# Altium PCB Modulo_THREAD.pcbdoc
Units mm, origin at the board's own origin, x right, y up, seen from the top; angles counter-clockwise.
Board outline 60.34 x 40.36 mm, 2 copper layers (Top Layer, Bottom Layer); 23 components, 124 nets, 327 pads, 146 vias.
Unrouted connection lines stored in the file: 1.
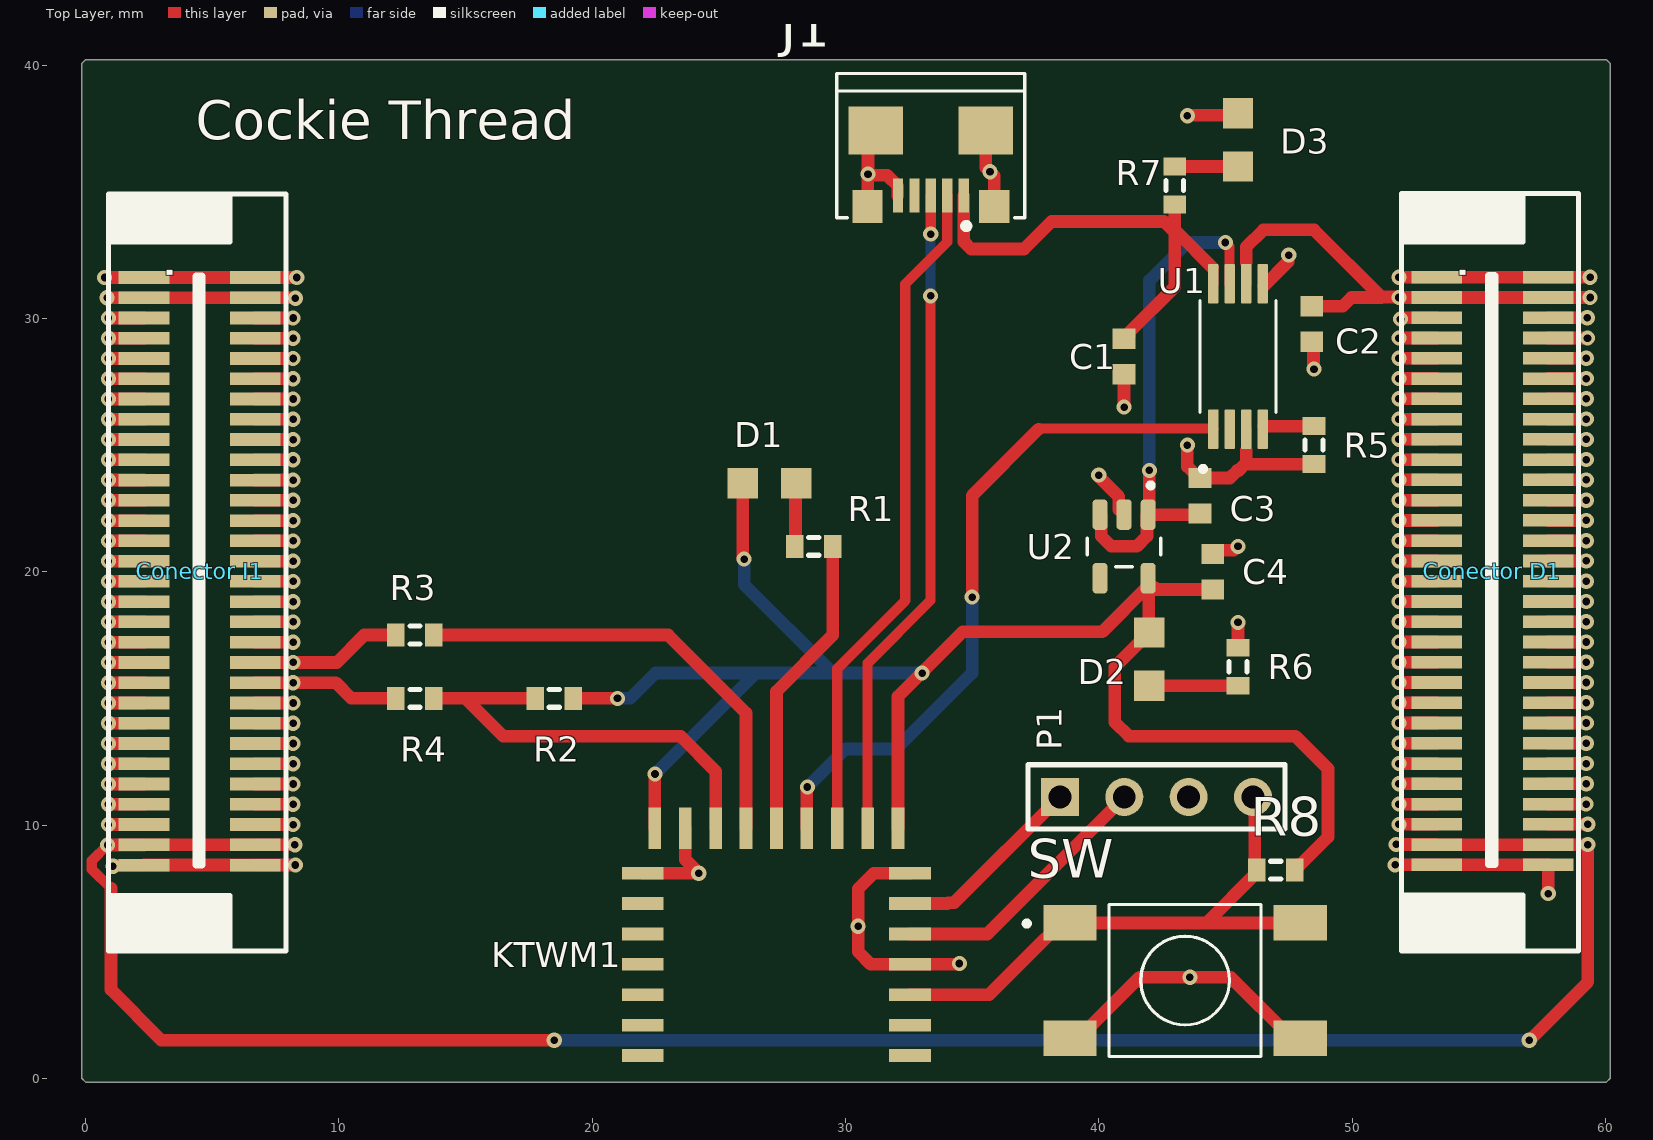
[diagram p0: Top Layer view]
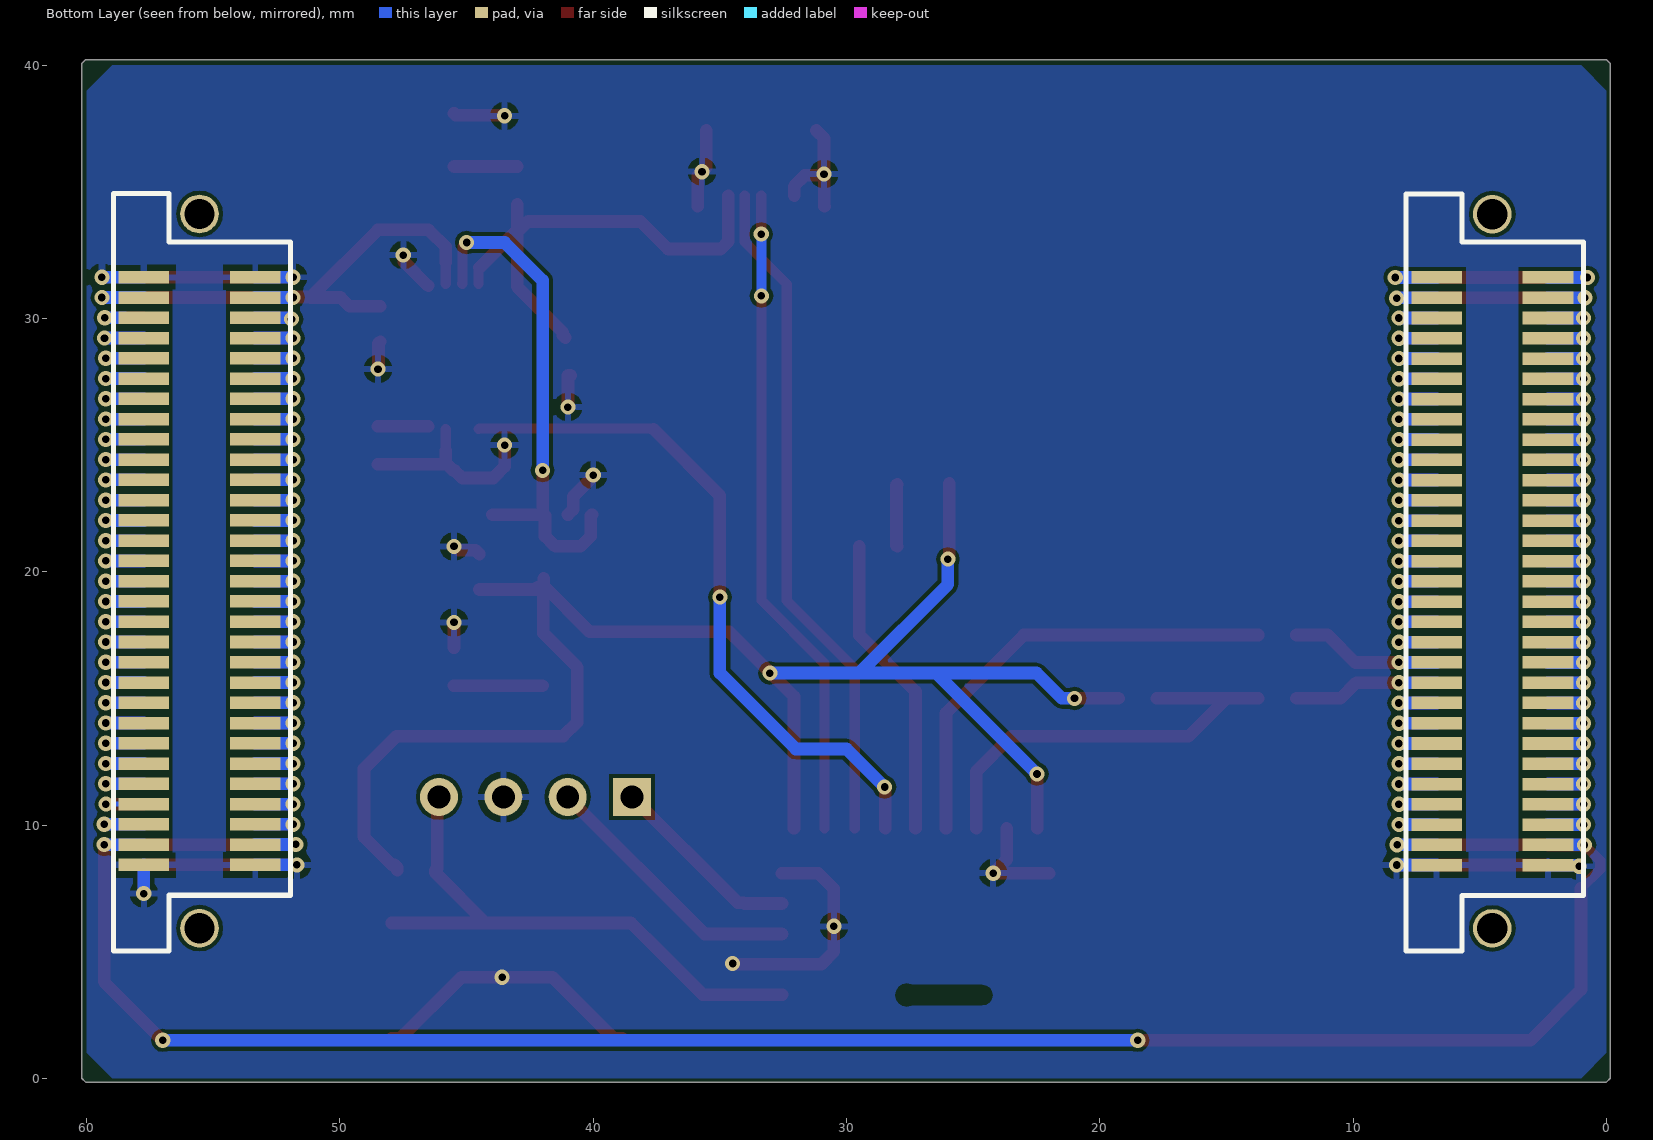
[diagram p1: Bottom Layer view, seen from below]

## Layer stack, top to bottom
Top Solder: solder mask 0.01, Solder Resist, Dk 3.5
Top Layer: signal copper 0.035
Dielectric1: dielectric 0.32, FR-4, Dk 4.8
Bottom Layer: signal copper 0.035
Bottom Solder: solder mask 0.01, Solder Resist, Dk 3.5

## Board outline
-0.15,0 0,-0.15 60.044,-0.15 60.194,0 60.194,40.063 60.044,40.213 0,40.213 -0.15,40.063

## Design rules (kind name [scope] priority, off if disabled: settings)
Clearance Clearance_2 [OnLayer('Bottom Layer') And (IsThruPin Or IsSMTPin Or IsWire) vs OnLayer('Bottom Layer') And (IsThruPin Or IsSMTPin Or IsWire Or IsVia)] p1: gap=0.2 ignorepadtopadclearanceinfootprint=FALSE except(0: Arc-Hole Track-Hole SMDPad-Hole THPad-Hole Via-Hole Fill-Hole Poly-Hole Region-Hole Text-Hole)
Clearance Clearance_1 [OnLayer('Top Layer') And (IsThruPin Or IsSMTPin Or IsWire Or IsVia) vs OnLayer('Top Layer') And (IsThruPin Or IsSMTPin Or IsWire Or IsVia)] p2: gap=0.2 ignorepadtopadclearanceinfootprint=FALSE except(0: Arc-Hole Track-Hole SMDPad-Hole THPad-Hole Via-Hole Fill-Hole Poly-Hole Region-Hole Text-Hole)
Clearance [All] p3: gap=0.15 ignorepadtopadclearanceinfootprint=FALSE except(0: Arc-Hole Track-Hole SMDPad-Hole THPad-Hole Via-Hole Fill-Hole Poly-Hole Region-Hole Text-Hole)
PlaneConnect [All] p1: planeconnectstyle=Relief reliefexpansion=0.635 reliefentries=4 reliefconductorwidth=0.305 reliefairgap=0.254
PolygonConnect [All] p1: connectstyle=Relief reliefconductorwidth=0.254 reliefentries=4 polygonreliefangle="90 Angle" airgapwidth=0.254
RoutingVias [All] p1: holewidth=0.711 width=1.27 viastyle="Through Hole" minholewidth=0.711 minwidth=1.27 maxholewidth=0.711 maxwidth=1.27
SolderMaskExpansion [All] p1: expansion=0 istentingtop=FALSE
Width Width_1 [All] p1: maxlimit=0.5 minlimit=0.3 preferedwidth=0.3 minimp=50.000000 maximp=50.000000 favimp=50.000000
Width Net_Width_8 [InNet('N76831')] p2: maxlimit=0.005 minlimit=0.005 preferedwidth=0.005
Width Net_Width_7 [InNet('I51') Or InNet('I52') Or InNet('I53') Or InNet('I54') Or InNet('I55') Or InNet('I56') Or InNet('I57') Or InNet('I58')] p3: maxlimit=0.2 minlimit=0.2 preferedwidth=0.2
Width Net_Width_6 [InNet('I35') Or InNet('I36') Or InNet('I37') Or InNet('I38') Or InNet('I39') Or InNet('I40') Or InNet('I41') Or InNet('I42') Or InNet('I43') Or InNet('I44') Or InNet('I45') Or InNet('I46') Or InNet('I47') Or InNet('I48') Or InNet('I49') Or InNet('I50')] p4: maxlimit=0.2 minlimit=0.2 preferedwidth=0.2
Width Net_Width_5 [InNet('I15') Or InNet('I16') Or InNet('I17') Or InNet('I18') Or InNet('I19') Or InNet('I20') Or InNet('I21') Or InNet('I22') Or InNet('I23') Or InNet('I24') Or InNet('I25') Or InNet('I26') Or InNet('I27') Or InNet('I28') Or InNet('I33') Or InNet('I34')] p5: maxlimit=0.2 minlimit=0.2 preferedwidth=0.2
Width Net_Width_4 [InNet('D55') Or InNet('D56') Or InNet('DGND') Or InNet('DVDD') Or InNet('I3') Or InNet('I4') Or InNet('I5') Or InNet('I6') Or InNet('I7') Or InNet('I8') Or InNet('I9') Or InNet('I10') Or InNet('I11') Or InNet('I12') Or InNet('I13') Or InNet('I14')] p6: maxlimit=0.2 minlimit=0.2 preferedwidth=0.2
Width Net_Width_3 [InNet('D39') Or InNet('D40') Or InNet('D41') Or InNet('D42') Or InNet('D43') Or InNet('D44') Or InNet('D45') Or InNet('D46') Or InNet('D47') Or InNet('D48') Or InNet('D49') Or InNet('D50') Or InNet('D51') Or InNet('D52') Or InNet('D53') Or InNet('D54')] p7: maxlimit=0.2 minlimit=0.2 preferedwidth=0.2
Width Net_Width_2 [InNet('D17') Or InNet('D18') Or InNet('D19') Or InNet('D20') Or InNet('D21') Or InNet('D22') Or InNet('D23') Or InNet('D24') Or InNet('D25') Or InNet('D26') Or InNet('D27') Or InNet('D28') Or InNet('D35') Or InNet('D36') Or InNet('D37') Or InNet('D38')] p8: maxlimit=0.2 minlimit=0.2 preferedwidth=0.2
Width Net_Width_1 [InNet('AGND') Or InNet('AVDD') Or InNet('D3') Or InNet('D4') Or InNet('D5') Or InNet('D6') Or InNet('D7') Or InNet('D8') Or InNet('D9') Or InNet('D10') Or InNet('D11') Or InNet('D12') Or InNet('D13') Or InNet('D14') Or InNet('D15') Or InNet('D16')] p9: maxlimit=0.2 minlimit=0.2 preferedwidth=0.2
Width [All] p10: maxlimit=0.203 minlimit=0.203 preferedwidth=0.203
29 further rules are at their usual default settings.

## Classes and differential pairs
component class Alimentacion: C1 C2 C3 C4 D2 R5 R6 U1 U2
component class USB: D3 J1 R7
component class Modulo: 1 D1 P1 R1 R2 R3 R4 R8 SW
component class Conectores: "Conector D1" "Conector I1"

## Components (designator, comment, footprint, x,y, rotation, side; value= is the part's Value field where it differs from the comment)
C1 "GRM188R60J106ME84D" 1608[0603] 41,28.5 r270 top value=10u
C2 "GRM188R60J106ME84D" 1608[0603] 48.41,29.78 r90 top value=10u
C3 "0603B104K6R3CT" 1608[0603] 44,23 r90 top value=0.1uF
C4 "0603B104K6R3CT" 1608[0603] 44.5,20 r270 top value=0.1uF
"Conector D1" "Cookie_Connector" COOKIECON_HEADER_AND_SOCKET 53.347,31.626 r270 top
"Conector I1" "Cookie_Connector" COOKIECON_HEADER_AND_SOCKET 2.305,31.619 r270 top
D1 "LTST-C170TBKT" DIOC200X125X110 27,23.5 r180 top
D2 "LTST-C170TBKT" DIOC200X125X110 42,16.55 r90 top
D3 "LTST-C170TBKT" DIOC200X125X110 45.5,37.05 r90 top
J1 "DX4R005HJ5R2000" JAE_DX4R005HJ5R2000 33.37,34.85 r180 top
KTWM1 "KTWM102" KTWM102 32.55,0.9 r0 top
P1 "Header 4" HDR1X4 38.47,11.11 r0 top
R1 "ERJ-1GNF66R5C" J1-0603 28.75,21 r0 top value=66.5
R2 "RCS060340K2FKEA" J1-0603 18.5,15 r180 top value=40.2K
R3 "ERJ-UP3D1001V" J1-0603 13,17.5 r0 top value=1K
R4 "ERJ-UP3D1001V" J1-0603 13,15 r0 top value=1K
R5 "ERJ-3RBD2491V" J1-0603 48.5,25 r90 top value=2.49k
R6 "ERJ-1GNF66R5C" J1-0603 45.5,16.25 r90 top value=66.5
R7 "ERJ-UP3D1001V" J1-0603 43,35.25 r270 top value=1K
R8 "ERJ-UP3D1001V" J1-0603 46.99,8.22 r0 top value=1K
SW "4-1437565-2" SW_4-1437565-2 43.41,3.86 r0 top
U1 "TPS2115APWR" SOP65P640X120-8N 45.5,28.5 r90 top
U2 "LP5907QMFX-3.3Q1" SOT95P280X145-5N 41,21 r270 top

## Footprints (in the part's own frame and the unit in brackets; to place one, negate y for a bottom-side part, rotate by r counter-clockwise, add the part's x,y. Pads: shape width x height; smd on the part's side, far side on the other; paste and mask are expansions set on the pad)
1608[0603] [mm] "Chip Capacitor, Body 1.6x0.8mm, IPC High Density"
  rect 0.8x0.9 smd: 1(-0.7,0) 2(0.7,0)
  body extent -0.87,-0.48 0.87,0.48, height 1.3
COOKIECON_HEADER_AND_SOCKET [mil]
  rect 19.63x78.73 smd: 1(0,0) 2(31.48,0) 3(63,0) 4(94.48,0) 5(126,0) 6(157.47,0) 7(188.97,0) 8(220.47,0) 9(251.97,0) 10(283.45,0) 11(314.95,0) 12(346.45,0) 13(377.95,0) 14(409.43,0) 15(440.93,0) 16(472.43,0) 17(503.93,0) 18(535.42,0) 19(566.92,0) 20(598.42,0) 21(629.92,0) 22(661.42,0) 23(692.9,0) 24(724.4,0) 25(755.9,0) 26(787.4,0) 27(818.88,0) 28(850.38,0) 29(881.88,0) 30(913.38,0) 31(913.38,173.22) 32(881.88,173.22) 33(850.38,173.22) 34(818.88,173.22) 35(787.4,173.22) 36(755.9,173.22) 37(724.4,173.22) 38(692.9,173.22) 39(661.42,173.22) 40(629.92,173.22) 41(598.42,173.22) 42(566.92,173.22) 43(535.42,173.22) 44(503.93,173.22) 45(472.43,173.22) 46(440.93,173.22) 47(409.43,173.22) 48(377.95,173.22) 49(346.45,173.22) 50(314.95,173.22) 51(283.45,173.22) 52(251.97,173.22) 53(220.47,173.22) 54(188.97,173.22) 55(157.47,173.22) 56(126,173.22) 57(94.48,173.22) 58(63,173.22) 59(31.48,173.22) 60(0,173.22)
  rect 19.47x78.73 smd far side: 61(0,173.22) 62(31.48,173.22) 63(63,173.22) 64(94.48,173.22) 65(126,173.22) 66(157.47,173.22) 67(188.97,173.22) 68(220.47,173.22) 69(251.97,173.22) 70(283.45,173.22) 71(314.95,173.22) 72(346.45,173.22) 73(377.95,173.22) 74(409.43,173.22) 75(440.93,173.22) 76(472.43,173.22) 77(503.93,173.22) 78(535.42,173.22) 79(566.92,173.22) 80(598.42,173.22) 81(629.92,173.22) 82(661.42,173.22) 83(692.9,173.22) 84(724.4,173.22) 85(755.9,173.22) 86(787.4,173.22) 87(818.88,173.22) 88(850.38,173.22) 89(881.88,173.22) 90(913.38,173.22) 91(913.38,0) 92(881.88,0) 93(850.38,0) 94(818.88,0) 95(787.4,0) 96(755.9,0) 97(724.4,0) 98(692.9,0) 99(661.42,0) 100(629.92,0) 101(598.42,0) 102(566.92,0) 103(535.42,0) 104(503.93,0) 105(472.43,0) 106(440.93,0) 107(409.43,0) 108(377.95,0) 109(346.45,0) 110(314.95,0) 111(283.45,0) 112(251.97,0) 113(220.47,0) 114(188.97,0) 115(157.47,0) 116(126,0) 117(94.48,0) 118(63,0) 119(31.48,0) 120(0,0)
  round 47.23 / inner round 60 / far side round 60 hole 47.23: 121(1011.8,86.6) 122(-98.42,86.6)
  silkscreen extent -130,-55 1047,220
DIOC200X125X110 [mm]
  rect 1.2x1.2 smd: NEG(-1.05,0) POS(1.05,0)
HDR1X4 [mm] "Connector; Header; 4 Position"
  rect 1.5x1.5 hole 0.9: 1(0,0)
  round 1.5 hole 0.9: 2(2.54,0) 3(5.08,0) 4(7.62,0)
  silkscreen extent -1.27,-1.27 8.89,1.27
J1-0603 [mm] "Chip Resistor, Body 1.6x0.8mm, IPC High Density"
  rect 0.7x0.9 smd: 1(-0.75,0) 2(0.75,0)
  silkscreen extent -0.2,-0.35 0.2,0.35, body extent -0.85,-0.48 0.85,0.48, height 0.9
JAE_DX4R005HJ5R2000 [mm]
  rect 0.4x1.35 smd: 1(-1.3,0) 2(-0.65,0) 3(0,0) 4(0.65,0) 5(1.3,0)
  rect 1.2x1.3 smd: SH1(-2.5,0.425) SH2(2.5,0.425)
  rect 2.15x1.9 smd: SH3(-2.175,-2.575) SH4(2.175,-2.575)
  silkscreen extent -3.71,-4.82 3.71,1.32
KTWM102 [mm]
  rect 1.65x0.5 smd: 1(0,0) 2(0,1.2) 3(0,2.4) 4(0,3.6) 5(0,4.8) 6(0,6) 7(0,7.2) 17(-10.55,7.2) 18(-10.55,6) 19(-10.55,4.8) 20(-10.55,3.6) 21(-10.55,2.4) 22(-10.55,1.2) 23(-10.55,0)
  rect 0.5x1.65 smd: 8(-0.475,8.975) 9(-1.675,8.975) 10(-2.875,8.975) 11(-4.075,8.975) 12(-5.275,8.975) 13(-6.475,8.975) 14(-7.675,8.975) 15(-8.875,8.975) 16(-10.075,8.975)
  body extent -10.79,-5.98 0.31,9.43, height 2
SOP65P640X120-8N [mm]
  rrect25% 1.57x0.41 smd: 1(-2.87,0.975) 2(-2.87,0.325) 3(-2.87,-0.325) 4(-2.87,-0.975) 5(2.87,-0.975) 6(2.87,-0.325) 7(2.87,0.325) 8(2.87,0.975)
  silkscreen extent -4.54,-1.5 2.2,1.5, body extent -3.07,-1.48 3.33,1.52, height 1.2
SOT95P280X145-5N [mm]
  rrect50% 1.21x0.59 smd: 1(-1.255,0.95) 2(-1.255,0) 3(-1.255,-0.95) 4(1.255,-0.95) 5(1.255,0.95)
  silkscreen extent -2.51,-1.45 0.8,1.45, body extent -1.4,-1.45 1.4,1.45, height 1.45
SW_4-1437565-2 [mm]
  rect 2.1x1.4 smd: 1(-4.55,2.275) 2(4.55,2.275) 3(-4.55,-2.275) 4(4.55,-2.275)
  silkscreen extent -6.35,-3 3,3, body extent -5.3,-2.87 4.7,3.13, height 4.98

## Part data
C1 C2: library part "Cap Semi", "Capacitor (Semiconductor SIM Model)", Supplier Part Number 1=81-GRM188R60J106ME4D, LatestRevisionDate=29-May-2009, LatestRevisionNote="IPC-7351 Footprint Added.", PackageDescription="Chip Capacitor", PackageReference=C1206, Published=8-Jun-2000, Publisher="Altium Limited", Supplier 1=Mouser, Supplier 2=Digi-Key, Supplier Part Number 2=490-7316-6-ND
C3 C4: library part "Cap Semi", "Capacitor (Semiconductor SIM Model)", Supplier Part Number 1=791-0603B104K6R3CT, LatestRevisionDate=29-May-2009, LatestRevisionNote="IPC-7351 Footprint Added.", PackageDescription="Chip Capacitor", PackageReference=C1206, Published=8-Jun-2000, Publisher="Altium Limited", Supplier 1=Mouser
D1 D2: "Blue 470nm LED Indication - Discrete 3.3V 0805 _2012 Metric_", Package="0805 Lite-On", Supplier Part Number 1=160-1579-6-ND, Digi-Key_Part_Number=160-1579-1-ND, Digi-Key_Purchase_URL=https://www.digikey.jp/product-detail/en/lite-on-inc/LTST-C170TBKT/160-1579-1-ND/564889?utm_source=snapeda&utm_medium=aggregator&utm_campaign=symbol, MF="Lite-On Inc.", MP=LTST-C170TBKT, SnapEDA_Link=https://www.snapeda.com/parts/LTST-C170TBKT/Lite-On%20Inc./view-part/217848/?ref=snap, Supplier 1=Digi-Key, Supplier 2=RSComponents, Supplier 3=Mouser, Supplier Part Number 2=6920913, Supplier Part Number 3=859-LTST-C170TBKT
D3: "Blue 470nm LED Indication - Discrete 3.3V 0805 _2012 Metric_", Package="0805 Lite-On", Supplier Part Number 1=160-1579-1-ND, Digi-Key_Part_Number=160-1579-1-ND, Digi-Key_Purchase_URL=https://www.digikey.jp/product-detail/en/lite-on-inc/LTST-C170TBKT/160-1579-1-ND/564889?utm_source=snapeda&utm_medium=aggregator&utm_campaign=symbol, MF="Lite-On Inc.", MP=LTST-C170TBKT, SnapEDA_Link=https://www.snapeda.com/parts/LTST-C170TBKT/Lite-On%20Inc./view-part/217848/?ref=snap, Supplier 1=Digi-Key, Supplier 2=RSComponents, Supplier 3=Mouser, Supplier Part Number 2=6920913, Supplier Part Number 3=859-LTST-C170TBKT
J1: "USB - micro B USB 2.0 Receptacle Connector 5 Position Surface Mount, Right Angle", Package=None, Supplier Part Number 1=656-DX4R005HJ5R2000, Availability=Unavailable, MF="JAE Electronics", MP=DX4R005HJ5R2000, Price=None, SnapEDA_Link=https://www.snapeda.com/parts/DX4R005HJ5R2000/JAE%20Electronics/view-part/554854/?ref=snap, Supplier 1=Mouser, Supplier 2=Digi-Key, Supplier Part Number 2=670-2674-6-ND
KTWM1: "https://www.kirale.com/products/ktwm102/"
P1: "Header, 4-Pin", LatestRevisionDate=17-Jul-2002, LatestRevisionNote="Re-released for DXP Platform.", Publisher="Altium Limited"
R1 R6: library part Res3, "Resistor", Supplier Part Number 1=667-ERJ-1GNF66R5C, LatestRevisionDate=29-May-2009, LatestRevisionNote="IPC-7351 Footprint Added.", PackageDescription="Chip Resistor", PackageReference=J1-0603, Published=8-Jun-2000, Publisher="Altium Limited", Supplier 1=Mouser
R2: library part Res3, "Resistor", Supplier Part Number 1=71-RCS060340K2FKEA, LatestRevisionDate=29-May-2009, LatestRevisionNote="IPC-7351 Footprint Added.", PackageDescription="Chip Resistor", PackageReference=J1-0603, Published=8-Jun-2000, Publisher="Altium Limited", Supplier 1=Mouser, Supplier 2=Digi-Key, Supplier Part Number 2=541-10468-6-ND
R3 R7 R8: library part Res3, "Resistor", Supplier Part Number 1=667-ERJ-UP3D1001V, LatestRevisionDate=29-May-2009, LatestRevisionNote="IPC-7351 Footprint Added.", PackageDescription="Chip Resistor", PackageReference=J1-0603, Published=8-Jun-2000, Publisher="Altium Limited", Supplier 1=Mouser
R4: library part Res3, "Resistor", LatestRevisionDate=29-May-2009, LatestRevisionNote="IPC-7351 Footprint Added.", PackageDescription="Chip Resistor", PackageReference=J1-0603, Published=8-Jun-2000, Publisher="Altium Limited", Supplier 1=Mouser
R5: library part Res3, "Resistor", Supplier Part Number 1=667-ERJ-3RBD2491V, LatestRevisionDate=29-May-2009, LatestRevisionNote="IPC-7351 Footprint Added.", PackageDescription="Chip Resistor", PackageReference=J1-0603, Published=8-Jun-2000, Publisher="Altium Limited", Supplier 1=Mouser
SW: "Switch Tactile OFF _ON_ SPST Round Button Gull Wing 0.05A 24VDC 1VA 9.18N SMD T/R", Package=None, Supplier Part Number 1=7182455, Availability=Unavailable, MF="TE Connectivity", MP=FSM4JSMATR, Price=None, SnapEDA_Link=https://www.snapeda.com/parts/FSM4JSMATR/TE%20Connectivity%20ALCOSWITCH%20Switches/view-part/2774279/?ref=snap, Supplier 1=RSComponents, Supplier 2=Mouser, Supplier Part Number 2=506-FSM4JSMATR, TE_purchase_URL=https://www.te.com/usa-en/product-4-1437565-2.html?te_bu=Cor&te_type=disp&te_campaign=seda_glo_cor-seda-global-disp-prtnr-fy19-seda-model-bom-cta_sma-317_1&elqCampaignId=32493
U1: "2.8-5.5-V, 84-m?, 1.25-A, power mux with manual, automatic switchover and status output 8-TSSOP -40 to 85", Package=None, Supplier Part Number 1=595-TPS2115APWR, Availability=Unavailable, MP=TPS2115APWR, Price=None, Supplier 1=Mouser, Supplier 2=Digi-Key, Supplier Part Number 2=296-16940-6-ND
U2: "Automotive 250-mA, low-noise, high-PSRR, low-IQ, ultra-low-dropout voltage regulator with low-IQ 5-SOT-23 -40 to 125", Package="SOT-23-5 Texas Instruments", Supplier Part Number 1=595-LP5907QMFX-3.3Q1, Availability=Good, Check_prices=https://www.snapeda.com/parts/LP5907QMFX-3.3Q1/Texas%20Instruments/view-part/559786/?ref=eda, MF="Texas Instruments", MP=LP5907QMFX-3.3Q1, Price=None, Purchase-URL=https://pricing.snapeda.com/search/part/LP5907QMFX-3.3Q1/?ref=eda, SnapEDA_Link=https://www.snapeda.com/parts/LP5907QMFX-3.3Q1/Texas%20Instruments/view-part/559786/?ref=snap, Supplier 1=Mouser

## Via types
v1: diameter 0.6, hole 0.3, Top Layer to Bottom Layer, 146 vias

## Nets (pads, with @x,y where several pads share a name; then routed paths per layer and width w, separated by ;. In a path a pad name is that pad's centre, name@x,y a point inside that pad or via, vN(x,y) a via of type N, cw(c..) or ccw(c..) an arc to the next point about the centre after c; other vN are vias at no path point)
3V3: C4.2 D1.POS D2.POS KTWM1.8 KTWM1.16 R2.1 R8.2 U2.5 | length 70.4
  Top Layer w0.5: R2.1 v1(21,15) ; KTWM1.16 v1@22.475,11.975 ; D1.POS 25.95,20.55 v1(26,20.5) ; KTWM1.8 32.075,15.075 33,16 v1(33.025,16) ; v1@33.1,16.1 34.625,17.625 40.14,17.625 41.95,19.435 U2.5@41.95,19.545 ; U2.5 U2.5@41.95,19.545 ; C4.2 42.288,19.3 42.198,19.39 41.995,19.39 U2.5@41.975,19.41 ; R8.2 47.74,8.32 47.84,8.42 47.94,8.42 49.05,9.53 49.05,12.22 47.76,13.51 41.19,13.51 40.63,14.07 40.63,16.23 41.975,17.575 U2.5@41.975,19.41 ; U2.5@41.95,19.545 41.975,19.52 U2.5@41.975,19.41
  Bottom Layer w0.5: v1(21,15) 21.5,15 22.5,16 26.466,16 ; v1(22.481,12.015) 26.466,16 ; v1(26,20.5) 26,19.5 29.5,16 ; v1(33.025,16) 29.5,16 ; 26.466,16 29.5,16
AGND: "Conector I1.1" "Conector I1.60" "Conector I1.61" "Conector I1.120" | length 10.8
  Top Layer w0.5: v1(0.751,31.619) 2.305,31.619 6.705,31.619 v1(8.341,31.619)
  Bottom Layer w0.5: v1(0.751,31.619) 2.305,31.619 ; 6.705,31.619 v1(8.341,31.619)
AVDD: "Conector I1.2" "Conector I1.59" "Conector I1.62" "Conector I1.119" | length 12.1
  Top Layer w0.5: v1(0.847,30.819) 2.305,30.819 6.705,30.819 8.265,30.818 v1(8.284,30.8)
  Bottom Layer w0.2: 6.705,30.819 v1@8.284,30.819
  Bottom Layer w0.5: v1(0.847,30.819) 2.305,30.819 ; 6.705,30.819 6.708,30.816 8.268,30.816 v1(8.284,30.8)
D3: "Conector D1.3" "Conector D1.118" | length 2.9
  Top Layer w0.5: v1(51.914,29.974) 51.941,29.974 51.992,30.026 53.346,30.026
  Bottom Layer w0.2: v1(51.914,29.974) v1@51.94,30
  Bottom Layer w0.5: v1@51.94,30 51.947,29.993 51.96,29.993 51.99,30.023 53.344,30.023 53.347,30.026
D4: "Conector D1.4" "Conector D1.117" | length 3
  Top Layer w0.5: v1(51.852,29.227) 53.347,29.227
  Bottom Layer w0.5: v1(51.852,29.227) 53.347,29.227
D5: "Conector D1.5" "Conector D1.116" | length 3
  Top Layer w0.5: v1(51.852,28.426) 53.347,28.426
  Bottom Layer w0.5: v1(51.852,28.426) 53.347,28.426
D6: "Conector D1.6" "Conector D1.115" | length 3
  Top Layer w0.5: v1(51.852,27.627) 53.347,27.627
  Bottom Layer w0.5: v1(51.852,27.627) 53.347,27.627
D7: "Conector D1.7" "Conector D1.114" | length 3
  Top Layer w0.5: v1(51.852,26.827) 53.347,26.827
  Bottom Layer w0.5: v1(51.852,26.827) 53.347,26.827
D8: "Conector D1.8" "Conector D1.113" | length 3
  Top Layer w0.5: v1(51.852,26.027) 53.347,26.027
  Bottom Layer w0.5: v1(51.852,26.027) 53.347,26.027
D9: "Conector D1.9" "Conector D1.112" | length 3
  Top Layer w0.5: v1(51.852,25.226) 53.347,25.226
  Bottom Layer w0.5: v1(51.852,25.226) 53.347,25.226
D10: "Conector D1.10" "Conector D1.111" | length 3
  Top Layer w0.5: v1(51.852,24.427) 53.347,24.427
  Bottom Layer w0.5: v1(51.852,24.427) 53.347,24.427
D11: "Conector D1.11" "Conector D1.110" | length 3
  Top Layer w0.5: v1(51.852,23.627) 53.347,23.627
  Bottom Layer w0.5: v1(51.852,23.627) 53.347,23.627
D12: "Conector D1.12" "Conector D1.109" | length 3
  Top Layer w0.5: v1(51.852,22.827) 53.347,22.827
  Bottom Layer w0.5: v1(51.852,22.827) 53.347,22.827
D13: "Conector D1.13" "Conector D1.108" | length 3
  Top Layer w0.5: v1(51.852,22.026) 53.347,22.026
  Bottom Layer w0.5: v1(51.852,22.026) 53.347,22.026
D14: "Conector D1.14" "Conector D1.107" | length 3
  Top Layer w0.5: v1(51.852,21.227) 53.347,21.227
  Bottom Layer w0.5: v1(51.852,21.227) 53.347,21.227
D15: "Conector D1.15" "Conector D1.106" | length 3
  Top Layer w0.5: v1(51.852,20.427) 53.347,20.427
  Bottom Layer w0.5: v1(51.852,20.427) 53.347,20.427
D16: "Conector D1.16" "Conector D1.105" | length 3
  Top Layer w0.5: v1(51.852,19.627) 53.347,19.627
  Bottom Layer w0.5: v1(51.852,19.627) 53.347,19.627
D17: "Conector D1.17" "Conector D1.104" | length 3
  Top Layer w0.5: v1(51.852,18.826) 53.347,18.826
  Bottom Layer w0.5: v1(51.852,18.826) 53.347,18.826
D18: "Conector D1.18" "Conector D1.103" | length 3
  Top Layer w0.5: v1(51.852,18.027) 53.347,18.027
  Bottom Layer w0.5: v1(51.852,18.027) 53.347,18.027
D19: "Conector D1.19" "Conector D1.102" | length 3
  Top Layer w0.5: v1(51.852,17.227) 53.347,17.227
  Bottom Layer w0.5: v1(51.852,17.227) 53.347,17.227
D20: "Conector D1.20" "Conector D1.101" | length 3
  Top Layer w0.5: v1(51.852,16.427) 53.347,16.427
  Bottom Layer w0.5: v1(51.852,16.427) 53.347,16.427
D21: "Conector D1.21" "Conector D1.100" | length 3
  Top Layer w0.5: v1(51.852,15.627) 53.347,15.627
  Bottom Layer w0.5: v1(51.852,15.627) 53.347,15.627
D22: "Conector D1.22" "Conector D1.99" | length 3
  Top Layer w0.5: v1(51.852,14.826) 53.347,14.826
  Bottom Layer w0.5: v1(51.852,14.826) 53.347,14.826
D23: "Conector D1.23" "Conector D1.98" | length 3
  Top Layer w0.5: v1(51.852,14.027) 53.347,14.027
  Bottom Layer w0.5: v1(51.852,14.027) 53.347,14.027
D24: "Conector D1.24" "Conector D1.97" | length 3
  Top Layer w0.5: v1(51.852,13.227) 53.347,13.227
  Bottom Layer w0.5: v1(51.852,13.227) 53.347,13.227
D25: "Conector D1.25" "Conector D1.96" | length 3
  Top Layer w0.5: v1(51.852,12.427) 53.347,12.427
  Bottom Layer w0.5: v1(51.852,12.427) 53.347,12.427
D26: "Conector D1.26" "Conector D1.95" | length 3
  Top Layer w0.5: v1(51.852,11.626) 53.347,11.626
  Bottom Layer w0.5: v1(51.852,11.626) 53.347,11.626
D27: "Conector D1.27" "Conector D1.94" | length 3
  Top Layer w0.5: v1(51.852,10.827) 53.347,10.827
  Bottom Layer w0.5: v1(51.852,10.827) 53.347,10.827
D28: "Conector D1.28" "Conector D1.93" | length 3
  Top Layer w0.5: v1(51.852,10.027) 53.347,10.027
  Bottom Layer w0.5: v1(51.852,10.027) 53.347,10.027
D33: "Conector D1.33" "Conector D1.88" | length 3.1
  Top Layer w0.203: v1@59.303,10.029 v1(59.305,10.031)
  Top Layer w0.5: 57.747,10.027 59.301,10.027 v1@59.303,10.029
  Bottom Layer w0.203: v1@59.303,10.029 v1(59.305,10.031)
  Bottom Layer w0.5: 57.746,10.027 57.749,10.029 v1@59.303,10.029
D34: "Conector D1.34" "Conector D1.87" | length 3.1
  Top Layer w0.5: 57.747,10.827 v1(59.243,10.827)
  Bottom Layer w0.2: v1@59.243,10.831 v1@59.305,10.831
  Bottom Layer w0.203: 57.747,10.827 59.239,10.827 v1@59.243,10.831
  Bottom Layer w0.5: v1@59.239,10.827 v1(59.243,10.827)
D35: "Conector D1.35" "Conector D1.86" | length 3
  Top Layer w0.5: 57.746,11.626 v1(59.245,11.626)
  Bottom Layer w0.5: 57.746,11.626 v1(59.245,11.626)
D36: "Conector D1.36" "Conector D1.85" | length 4.5
  Top Layer w0.5: 57.746,12.427 v1(59.245,12.427)
  Bottom Layer w0.2: 57.019,12.424 58.517,12.424
  Bottom Layer w0.5: 57.746,12.427 v1(59.245,12.427)
D37: "Conector D1.37" "Conector D1.84" | length 3
  Top Layer w0.5: 57.746,13.227 v1(59.245,13.227)
  Bottom Layer w0.5: 57.746,13.227 v1(59.245,13.227)
D38: "Conector D1.38" "Conector D1.83" | length 3
  Top Layer w0.5: 57.746,14.027 v1(59.245,14.027)
  Bottom Layer w0.5: 57.746,14.027 v1(59.245,14.027)
D39: "Conector D1.39" "Conector D1.82" | length 3
  Top Layer w0.5: 57.746,14.826 v1(59.245,14.826)
  Bottom Layer w0.5: 57.746,14.826 v1(59.245,14.826)
D40: "Conector D1.40" "Conector D1.81" | length 3
  Top Layer w0.5: 57.746,15.627 v1(59.245,15.627)
  Bottom Layer w0.5: 57.746,15.627 v1(59.245,15.627)
D41: "Conector D1.41" "Conector D1.80" | length 3
  Top Layer w0.5: 57.746,16.427 v1(59.245,16.427)
  Bottom Layer w0.5: 57.746,16.427 v1(59.245,16.427)
D42: "Conector D1.42" "Conector D1.79" | length 3
  Top Layer w0.5: 57.746,17.227 v1(59.245,17.227)
  Bottom Layer w0.5: 57.746,17.227 v1(59.245,17.227)
D43: "Conector D1.43" "Conector D1.78" | length 3
  Top Layer w0.5: 57.746,18.027 v1(59.245,18.027)
  Bottom Layer w0.5: 57.746,18.027 v1(59.245,18.027)
D44: "Conector D1.44" "Conector D1.77" | length 3
  Top Layer w0.5: 57.746,18.826 v1(59.245,18.826)
  Bottom Layer w0.5: 57.746,18.826 v1(59.245,18.826)
D45: "Conector D1.45" "Conector D1.76" | length 3
  Top Layer w0.5: 57.746,19.627 v1(59.245,19.627)
  Bottom Layer w0.5: 57.746,19.627 v1(59.245,19.627)
D46: "Conector D1.46" "Conector D1.75" | length 3
  Top Layer w0.5: 57.746,20.427 v1(59.245,20.427)
  Bottom Layer w0.5: 57.746,20.427 v1(59.245,20.427)
D47: "Conector D1.47" "Conector D1.74" | length 3
  Top Layer w0.5: 57.746,21.227 v1(59.245,21.227)
  Bottom Layer w0.5: 57.746,21.227 v1(59.245,21.227)
D48: "Conector D1.48" "Conector D1.73" | length 3
  Top Layer w0.5: 57.746,22.026 v1(59.245,22.026)
  Bottom Layer w0.5: 57.746,22.026 v1(59.245,22.026)
D49: "Conector D1.49" "Conector D1.72" | length 3
  Top Layer w0.5: 57.746,22.827 v1(59.245,22.827)
  Bottom Layer w0.5: 57.746,22.827 v1(59.245,22.827)
D50: "Conector D1.50" "Conector D1.71" | length 3
  Top Layer w0.5: 57.746,23.627 v1(59.245,23.627)
  Bottom Layer w0.5: 57.746,23.627 v1(59.245,23.627)
D51: "Conector D1.51" "Conector D1.70" | length 3
  Top Layer w0.5: 57.746,24.427 v1(59.245,24.427)
  Bottom Layer w0.5: 57.746,24.427 v1(59.245,24.427)
D52: "Conector D1.52" "Conector D1.69" | length 3
  Top Layer w0.5: 57.746,25.226 v1(59.245,25.226)
  Bottom Layer w0.5: 57.746,25.226 v1(59.245,25.226)
D53: "Conector D1.53" "Conector D1.68" | length 3
  Top Layer w0.5: 57.746,26.027 v1(59.245,26.027)
  Bottom Layer w0.5: 57.746,26.027 v1(59.245,26.027)
D54: "Conector D1.54" "Conector D1.67" | length 3
  Top Layer w0.5: 57.746,26.827 v1(59.245,26.827)
  Bottom Layer w0.5: 57.746,26.827 v1(59.245,26.827)
D55: "Conector D1.55" "Conector D1.66" | length 3
  Top Layer w0.5: 57.746,27.627 v1(59.245,27.627)
  Bottom Layer w0.5: 57.746,27.627 v1(59.245,27.627)
D56: "Conector D1.56" "Conector D1.65" | length 3
  Top Layer w0.5: 57.746,28.426 v1(59.245,28.426)
  Bottom Layer w0.5: 57.746,28.426 v1(59.245,28.426)
D57: "Conector D1.57" "Conector D1.64" | length 3.1
  Top Layer w0.5: 57.746,29.227 v1(59.296,29.227)
  Bottom Layer w0.5: 57.746,29.227 v1(59.296,29.227)
D58: "Conector D1.58" "Conector D1.63" | length 2.3
  Top Layer w0.5: 57.746,30.026 v1(59.284,30.026)
  Bottom Layer w0.5: 58.496,30.026 v1(59.284,30.026)
D+: J1.3 KTWM1.9 | length 26
  Top Layer w0.4: KTWM1.9 30.875,16.385 33.36,18.87 v1(33.36,30.89) ; v1(33.37,33.33) J1.3
  Bottom Layer w0.4: v1(33.36,30.89) 33.36,33.32 v1(33.37,33.33)
D-: J1.2 KTWM1.10 | length 26.8
  Top Layer w0.4: KTWM1.10 29.675,16.175 32.36,18.86 32.36,31.36 34.02,33.02 J1.2
DGND: "Conector D1.1" "Conector D1.30" "Conector D1.31" "Conector D1.60" "Conector D1.61" "Conector D1.90" "Conector D1.91" "Conector D1.120" "Conector I1.30" "Conector I1.31" "Conector I1.90" "Conector I1.91" C1.2 C2.1 C3.2 C4.1 D3.POS J1.5 J1.SH1 J1.SH2 J1.SH3 J1.SH4 KTWM1.4 KTWM1.7 KTWM1.15 KTWM1.17 P1.3 R5.1 R6.2 SW.3 SW.4 U1.3 U1.5 U2.2 | length 82
  Top Layer w0.2: v1@8.28,8.419 v1(8.284,8.423)
  Top Layer w0.254: v1(1.077,8.372) v1@1.1,8.395 ; v1@1.128,8.395 2.282,8.395 2.305,8.372 ; 6.705,8.419 6.707,8.421 ; v1@8.278,8.421 v1@8.28,8.419
  Top Layer w0.4: 45.825,24.803 U1.3
  Top Layer w0.5: v1@1.1,8.395 1.105,8.391 1.123,8.391 1.128,8.395 1.15,8.418 2.304,8.418 6.705,8.419 ; 6.707,8.421 v1@8.278,8.421 ; KTWM1.17 v1(24.211,8.1) 23.675,8.636 KTWM1.15 ; J1.SH2 30.88,34.435 v1@30.88,35.69 ; J1.SH4 30.89,37.12 v1(30.89,35.7) v1@30.88,35.69 ; J1.5 32.07,35.225 31.641,35.654 30.963,35.654 30.927,35.69 v1@30.88,35.69 ; KTWM1.7 31.121,8.1 30.5,7.479 v1(30.5,6) 30.5,5 31,4.5 KTWM1.4 34.439,4.5 34.471,4.532 v1(34.498,4.532) ; J1.SH3 35.545,35.958 35.87,35.633 J1.SH1 ; SW.3 39.21,1.585 41.615,3.99 v1(43.6,3.99) 45.205,3.99 47.61,1.585 SW.4 ; v1(40,23.816) 40,23.755 40.795,22.96 40.795,22.46 U2.2 ; C1.2@40.9,27.75 41,27.75 v1(41,26.5) ; v1(43.5,25) 43.5,24.15 43.95,23.7 C3.2 45.173,23.7 45.473,24 45.527,24 45.777,24.25 R5.1 ; v1(43.5,38) 43.519,38.019 45.419,38.019 D3.POS ; C4.1 44.65,20.85 45.323,20.85 45.473,21 v1(45.5,21) ; R6.2 v1(45.5,18) ; 45.825,24.803 45.83,24.799 45.83,24.357 ; U1.5@46.52,31.287 47.481,32.248 47.481,32.481 v1(47.5,32.5) ; C2.1 48.481,29.009 48.481,28.019 v1(48.5,28) ; v1@51.7,8.426 53.347,8.426 ; v1(51.852,31.626) 53.347,31.626 57.746,31.626 v1(59.4,31.626) ; 53.347,8.426 57.746,8.426 v1(57.746,7.294)
  Bottom Layer w0.2: v1@8.28,8.419 v1(8.284,8.423)
  Bottom Layer w0.254: v1@8.278,8.421 v1@8.28,8.419
  Bottom Layer w0.5: v1(1.077,8.372) 1.104,8.372 1.148,8.416 2.302,8.416 2.305,8.419 ; 6.705,8.419 6.707,8.421 v1@8.278,8.421 ; v1@51.7,8.426 53.347,8.426 ; v1(51.852,31.626) 53.347,31.626 ; v1(57.746,7.294) 57.746,8.426 ; 57.746,31.626 v1(59.4,31.626)
  other v1: 51.7,8.426 35.708,35.795
DVDD: "Conector D1.2" "Conector D1.29" "Conector D1.32" "Conector D1.59" "Conector D1.62" "Conector D1.89" "Conector D1.92" "Conector D1.119" "Conector I1.29" "Conector I1.32" "Conector I1.89" "Conector I1.92" C2.2 U1.6 | length 115.4
  Top Layer w0.254: v1(0.867,9.21) v1@0.871,9.214 ; 2.301,9.214 2.305,9.219 ; v1(51.743,9.235) v1@51.748,9.231
  Top Layer w0.4: v1(0.867,9.21) 0.244,8.587 0.244,8.256 1,7.5 ; U1.6 45.825,32.197
  Top Layer w0.5: v1@0.871,9.214 2.301,9.214 ; 1,7.5 1,3.5 3,1.5 v1@18.5,1.5 ; 2.305,9.219 6.705,9.219 v1(8.265,9.219) ; 45.825,32.197 45.82,32.201 45.82,32.82 46.5,33.5 48.5,33.5 51.154,30.846 51.832,30.846 v1(51.852,30.827) 53.347,30.827 57.746,30.827 v1(59.4,30.827) ; C2.2 49.63,30.48 49.977,30.827 51.154,30.827 ; v1@51.748,9.231 53.342,9.231 53.347,9.227 57.746,9.227 v1(59.309,9.227) 59.309,3.809 v1@57,1.5
  Bottom Layer w0.5: v1(0.867,9.21) 0.873,9.216 2.302,9.216 2.305,9.219 ; 6.705,9.219 v1(8.265,9.219) ; v1(18.506,1.502) 18.508,1.5 56.996,1.5 v1(56.998,1.502) ; v1@51.734,9.227 51.737,9.229 53.344,9.229 53.347,9.227 ; v1(51.852,30.827) 53.347,30.827 ; 57.746,9.227 v1(59.309,9.227) ; 57.746,30.827 v1(59.4,30.827)
HV: C1.1 J1.1 R7.2 U1.8 | length 19.7
  Top Layer w0.4: U1.8@44.5,32 44.5,31.975 44.525,31.95 U1.8
  Top Layer w0.5: J1.1 34.67,33.033 34.963,32.74 37.05,32.74 38.14,33.83 42.58,33.83 43,33.41 ; C1.1@41.1,29.25 41.2,29.35 41.2,29.45 43,31.25 43,33.41 ; R7.2 43,33.5 43.09,33.41 ; U1.8@44.5,32 43.09,33.41 ; 43,33.41 43.09,33.41
I3: "Conector I1.3" "Conector I1.118" | length 2.8
  Top Layer w0.5: v1(0.899,30.019) 2.305,30.019
  Bottom Layer w0.5: v1(0.899,30.019) 2.305,30.019
I4: "Conector I1.4" "Conector I1.117" | length 2.8
  Top Layer w0.5: v1(0.899,29.219) 2.305,29.219
  Bottom Layer w0.5: v1(0.899,29.219) 2.305,29.219
I5: "Conector I1.5" "Conector I1.116" | length 2.8
  Top Layer w0.5: v1(0.899,28.418) 2.305,28.418
  Bottom Layer w0.5: v1(0.899,28.418) 2.305,28.418
I6: "Conector I1.6" "Conector I1.115" | length 2.8
  Top Layer w0.5: v1(0.899,27.619) 2.305,27.619
  Bottom Layer w0.5: v1(0.899,27.619) 2.305,27.619
I7: "Conector I1.7" "Conector I1.114" | length 2.8
  Top Layer w0.5: v1(0.899,26.819) 2.305,26.819
  Bottom Layer w0.5: v1(0.899,26.819) 2.305,26.819
I8: "Conector I1.8" "Conector I1.113" | length 2.8
  Top Layer w0.5: v1(0.899,26.019) 2.305,26.019
  Bottom Layer w0.5: v1(0.899,26.019) 2.305,26.019
I9: "Conector I1.9" "Conector I1.112" | length 2.8
  Top Layer w0.5: v1(0.899,25.219) 2.305,25.219
  Bottom Layer w0.5: v1(0.899,25.219) 2.305,25.219
I10: "Conector I1.10" "Conector I1.111" | length 2.8
  Top Layer w0.5: v1(0.899,24.419) 2.305,24.419
  Bottom Layer w0.5: v1(0.899,24.419) 2.305,24.419
I11: "Conector I1.11" "Conector I1.110" | length 2.8
  Top Layer w0.5: v1(0.899,23.619) 2.305,23.619
  Bottom Layer w0.5: v1(0.899,23.619) 2.305,23.619
I12: "Conector I1.12" "Conector I1.109" | length 2.8
  Top Layer w0.5: v1(0.899,22.819) 2.305,22.819
  Bottom Layer w0.5: v1(0.899,22.819) 2.305,22.819
I13: "Conector I1.13" "Conector I1.108" | length 2.8
  Top Layer w0.5: v1(0.899,22.019) 2.305,22.019
  Bottom Layer w0.5: v1(0.899,22.019) 2.305,22.019
I14: "Conector I1.14" "Conector I1.107" | length 2.8
  Top Layer w0.5: v1(0.899,21.219) 2.305,21.219
  Bottom Layer w0.5: v1(0.899,21.219) 2.305,21.219
I15: "Conector I1.15" "Conector I1.106" | length 2.8
  Top Layer w0.5: v1(0.899,20.419) 2.305,20.419
  Bottom Layer w0.5: v1(0.899,20.419) 2.305,20.419
I16: "Conector I1.16" "Conector I1.105" | length 2.8
  Top Layer w0.5: v1(0.899,19.619) 2.305,19.619
  Bottom Layer w0.5: v1(0.899,19.619) 2.305,19.619
I17: "Conector I1.17" "Conector I1.104" | length 2.8
  Top Layer w0.5: v1(0.899,18.819) 2.305,18.819
  Bottom Layer w0.5: v1(0.899,18.819) 2.305,18.819
I18: "Conector I1.18" "Conector I1.103" | length 2.8
  Top Layer w0.5: v1(0.899,18.019) 2.305,18.019
  Bottom Layer w0.5: v1(0.899,18.019) 2.305,18.019
I19: "Conector I1.19" "Conector I1.102" | length 2.8
  Top Layer w0.5: v1(0.899,17.219) 2.305,17.219
  Bottom Layer w0.5: v1(0.899,17.219) 2.305,17.219
I20: "Conector I1.20" "Conector I1.101" | length 2.8
  Top Layer w0.5: v1(0.899,16.419) 2.305,16.419
  Bottom Layer w0.5: v1(0.899,16.419) 2.305,16.419
I21: "Conector I1.21" "Conector I1.100" | length 2.8
  Top Layer w0.5: v1(0.899,15.619) 2.305,15.619
  Bottom Layer w0.5: v1(0.899,15.619) 2.305,15.619
I22: "Conector I1.22" "Conector I1.99" | length 2.8
  Top Layer w0.5: v1(0.899,14.819) 2.305,14.819
  Bottom Layer w0.5: v1(0.899,14.819) 2.305,14.819
I23: "Conector I1.23" "Conector I1.98" | length 2.8
  Top Layer w0.5: v1(0.899,14.019) 2.305,14.019
  Bottom Layer w0.5: v1(0.899,14.019) 2.305,14.019
I24: "Conector I1.24" "Conector I1.97" | length 2.8
  Top Layer w0.5: v1(0.899,13.219) 2.305,13.219
  Bottom Layer w0.5: v1(0.899,13.219) 2.305,13.219
I25: "Conector I1.25" "Conector I1.96" | length 2.8
  Top Layer w0.5: v1(0.899,12.419) 2.305,12.419
  Bottom Layer w0.5: v1(0.899,12.419) 2.305,12.419
I26: "Conector I1.26" "Conector I1.95" | length 2.8
  Top Layer w0.5: v1(0.899,11.619) 2.305,11.619
  Bottom Layer w0.5: v1(0.899,11.619) 2.305,11.619
I27: "Conector I1.27" "Conector I1.94" | length 2.8
  Top Layer w0.5: v1(0.899,10.819) 2.305,10.819
  Bottom Layer w0.5: v1(0.899,10.819) 2.305,10.819
I28: "Conector I1.28" "Conector I1.93" | length 2.8
  Top Layer w0.5: v1(0.899,10.019) 2.305,10.019
  Bottom Layer w0.5: v1(0.899,10.019) 2.305,10.019
I33: "Conector I1.33" "Conector I1.88" | length 3
  Top Layer w0.5: 6.705,10.019 v1(8.192,10.019)
  Bottom Layer w0.5: 6.705,10.019 v1(8.192,10.019)
I34: "Conector I1.34" "Conector I1.87" | length 3
  Top Layer w0.5: 6.705,10.819 v1(8.192,10.819)
  Bottom Layer w0.5: 6.705,10.819 v1(8.192,10.819)
I35: "Conector I1.35" "Conector I1.86" | length 3
  Top Layer w0.5: 6.705,11.619 v1(8.192,11.619)
  Bottom Layer w0.5: 6.705,11.619 v1(8.192,11.619)
I36: "Conector I1.36" "Conector I1.85" | length 3
  Top Layer w0.5: 6.705,12.419 v1(8.192,12.419)
  Bottom Layer w0.5: 6.705,12.419 v1(8.192,12.419)
I37: "Conector I1.37" "Conector I1.84" | length 3
  Top Layer w0.5: 6.705,13.219 v1(8.192,13.219)
  Bottom Layer w0.5: 6.705,13.219 v1(8.192,13.219)
I38: "Conector I1.38" "Conector I1.83" | length 3
  Top Layer w0.5: 6.705,14.019 v1(8.192,14.019)
  Bottom Layer w0.5: 6.705,14.019 v1(8.192,14.019)
I39: "Conector I1.39" "Conector I1.82" | length 3
  Top Layer w0.5: 6.705,14.819 v1(8.192,14.819)
  Bottom Layer w0.5: 6.705,14.819 v1(8.192,14.819)
I40: "Conector I1.40" "Conector I1.81" R4.1 | length 7.3
  Top Layer w0.5: 6.705,15.619 v1(8.192,15.619) 9.881,15.619 10.5,15 R4.1
  Bottom Layer w0.5: 6.705,15.619 v1(8.192,15.619)
I41: "Conector I1.41" "Conector I1.80" R3.1 | length 7.5
  Top Layer w0.5: 6.705,16.419 v1(8.192,16.419) 9.919,16.419 11,17.5 R3.1
  Bottom Layer w0.5: 6.705,16.419 v1(8.192,16.419)
I42: "Conector I1.42" "Conector I1.79" | length 3
  Top Layer w0.5: 6.705,17.219 v1(8.192,17.219)
  Bottom Layer w0.5: 6.705,17.219 v1(8.192,17.219)
I43: "Conector I1.43" "Conector I1.78" | length 3
  Top Layer w0.5: 6.705,18.019 v1(8.192,18.019)
  Bottom Layer w0.5: 6.705,18.019 v1(8.192,18.019)
I44: "Conector I1.44" "Conector I1.77" | length 3
  Top Layer w0.5: 6.705,18.819 v1(8.192,18.819)
  Bottom Layer w0.5: 6.705,18.819 v1(8.192,18.819)
I45: "Conector I1.45" "Conector I1.76" | length 3
  Top Layer w0.5: 6.705,19.619 v1(8.192,19.619)
  Bottom Layer w0.5: 6.705,19.619 v1(8.192,19.619)
I46: "Conector I1.46" "Conector I1.75" | length 3
  Top Layer w0.5: 6.705,20.419 v1(8.192,20.419)
  Bottom Layer w0.5: 6.705,20.419 v1(8.192,20.419)
I47: "Conector I1.47" "Conector I1.74" | length 3
  Top Layer w0.5: 6.705,21.219 v1(8.192,21.219)
  Bottom Layer w0.5: 6.705,21.219 v1(8.192,21.219)
I48: "Conector I1.48" "Conector I1.73" | length 3
  Top Layer w0.5: 6.705,22.019 v1(8.192,22.019)
  Bottom Layer w0.5: 6.705,22.019 v1(8.192,22.019)
I49: "Conector I1.49" "Conector I1.72" | length 3
  Top Layer w0.5: 6.705,22.819 v1(8.192,22.819)
  Bottom Layer w0.5: 6.705,22.819 v1(8.192,22.819)
I50: "Conector I1.50" "Conector I1.71" | length 3
  Top Layer w0.5: 6.705,23.619 v1(8.192,23.619)
  Bottom Layer w0.5: 6.705,23.619 v1(8.192,23.619)
I51: "Conector I1.51" "Conector I1.70" | length 3
  Top Layer w0.5: 6.705,24.419 v1(8.192,24.419)
  Bottom Layer w0.5: 6.705,24.419 v1(8.192,24.419)
I52: "Conector I1.52" "Conector I1.69" | length 3
  Top Layer w0.5: 6.705,25.219 v1(8.192,25.219)
  Bottom Layer w0.5: 6.705,25.219 v1(8.192,25.219)
I53: "Conector I1.53" "Conector I1.68" | length 3
  Top Layer w0.5: 6.705,26.019 v1(8.192,26.019)
  Bottom Layer w0.5: 6.705,26.019 v1(8.192,26.019)
I54: "Conector I1.54" "Conector I1.67" | length 3
  Top Layer w0.5: 6.705,26.819 v1(8.192,26.819)
  Bottom Layer w0.5: 6.705,26.819 v1(8.192,26.819)
I55: "Conector I1.55" "Conector I1.66" | length 3
  Top Layer w0.5: 6.705,27.619 v1(8.192,27.619)
  Bottom Layer w0.5: 6.705,27.619 v1(8.192,27.619)
I56: "Conector I1.56" "Conector I1.65" | length 3
  Top Layer w0.5: 6.705,28.418 v1(8.192,28.418)
  Bottom Layer w0.5: 6.705,28.418 v1(8.192,28.418)
I57: "Conector I1.57" "Conector I1.64" | length 3
  Top Layer w0.5: 6.705,29.219 v1(8.192,29.219)
  Bottom Layer w0.5: 6.705,29.219 v1(8.192,29.219)
I58: "Conector I1.58" "Conector I1.63" | length 3
  Top Layer w0.2: v1@8,30.019 v1(8.192,30.019)
  Top Layer w0.5: 6.705,30.019 v1@8,30.019
  Bottom Layer w0.5: 6.705,30.019 v1(8.192,30.019)
NetD1_NEG: D1.NEG R1.1 | length 2.5
  Top Layer w0.203: D1.NEG@28,23.45 D1.NEG
  Top Layer w0.5: R1.1 28.025,21.025 28.025,23.425 D1.NEG@28,23.45
NetD2_NEG: D2.NEG R6.1 | length 3.5
  Top Layer w0.5: D2.NEG R6.1
NetD3_NEG: D3.NEG R7.1 | length 2.5
  Top Layer w0.5: R7.1 D3.NEG
NetKTWM1_5: KTWM1.5 P1.2 | length 10.7
  Top Layer w0.5: KTWM1.5 35.6,5.7 P1.2
NetKTWM1_6: KTWM1.6 P1.1 | length 7.7
  Top Layer w0.5: KTWM1.6 34.03,6.9 34.06,6.93 34.29,6.93 P1.1
NetKTWM1_12: KTWM1.12 R1.2 | length 12
  Top Layer w0.5: KTWM1.12 27.275,15.275 29.5,17.5 R1.2
NetR5_2: R5.2 U1.4 | length 2.1
  Top Layer w0.203: U1.4 46.475,25.647 U1.4@46.578,25.75
  Top Layer w0.5: U1.4@46.52,25.75 46.578,25.75 R5.2
PMUX: C3.1 U1.7 U2.1 U2.3 | length 20.8
  Top Layer w0.254: U2.3@40.05,21.934 U2.3
  Top Layer w0.4: v1(45,33) 45.17,32.83 45.17,31.375 U1.7
  Top Layer w0.5: U2.3 40.095,22.21 40.095,21.405 40.5,21 41.5,21 41.905,21.405 41.905,22.21 U2.1 ; v1(42,24) 42,22.305 U2.1 ; C3.1@43.993,22.253 41.952,22.253 U2.1
  Bottom Layer w0.5: v1(42,24) 42,31.5 43.5,33 v1(45,33)
RESET: KTWM1.3 P1.4 R8.1 SW.1 SW.2 | length 22.4
  Top Layer w0.5: KTWM1.3 35.675,3.3 37.353,4.978 38.51,6.135 SW.1 44.255,6.135 ; P1.4 46.165,11.035 46.165,8.295 R8.1 46.24,8.12 44.255,6.135 ; SW.2 44.255,6.135
Rx_Kirale: KTWM1.14 R2.2 R4.2 | length 17.3
  Top Layer w0.5: R4.2 15,15 ; R2.2 15,15 ; KTWM1.14 24.875,12.125 23.5,13.5 16.5,13.5 15,15
TX_Kirale: KTWM1.13 R3.2 | length 18.1
  Top Layer w0.5: R3.2 23,17.5 26.075,14.425 KTWM1.13
USB_Detect: KTWM1.11 U1.1 | length 27.6
  Top Layer w0.4: 37.63,25.63 37.65,25.65 44.505,25.65 U1.1
  Top Layer w0.5: KTWM1.11 28.475,11.475 v1(28.5,11.5) ; v1(35,19) 35,23 37.63,25.63
  Bottom Layer w0.5: v1(28.5,11.5) 30,13 32,13 35,16 v1(35,19)
pads on no net: "Conector D1.121" "Conector D1.122" "Conector I1.121" "Conector I1.122" J1.4 KTWM1.1 KTWM1.2 KTWM1.18 KTWM1.19 KTWM1.20 KTWM1.21 KTWM1.22 KTWM1.23 U1.2 U2.4

## Polygon pours and split planes (outlines as drawn)
DGND on Bottom Layer "DGND_L02_P000" (solid, pour order 0): 0,39 1,40 59,40 60,39 60,1 59,0 1,0 0,1

## Silkscreen, mask and mechanical layers (free items; w line width, h text height)
Top Overlay:
  text "Cockie Thread" at 4.344,37.084 h1.52
Mechanical 1:
  lines w0.254: -0.15,0 -0.15,40.06 0,40.21 60.04,40.21 60.19,40.06 60.19,0.01 60.03,-0.15 0,-0.15 -0.1,-0.05

## Text inside footprints (layer, text, board x,y; h text height)
J1: Mechanical 13 ">PCB edge" at 34.372,38.958 h0.81 r180